# Altium PCB PCB_TINY ORANGE_2022-09-27.pcbdoc
Units mil, origin at the board's own origin, x right, y up, seen from the top; angles counter-clockwise.
Board outline 3081.74 x 4388.89 mil, 2 copper layers (Top Layer, Bottom Layer); 53 components, 93 nets, 349 pads, 9 vias.
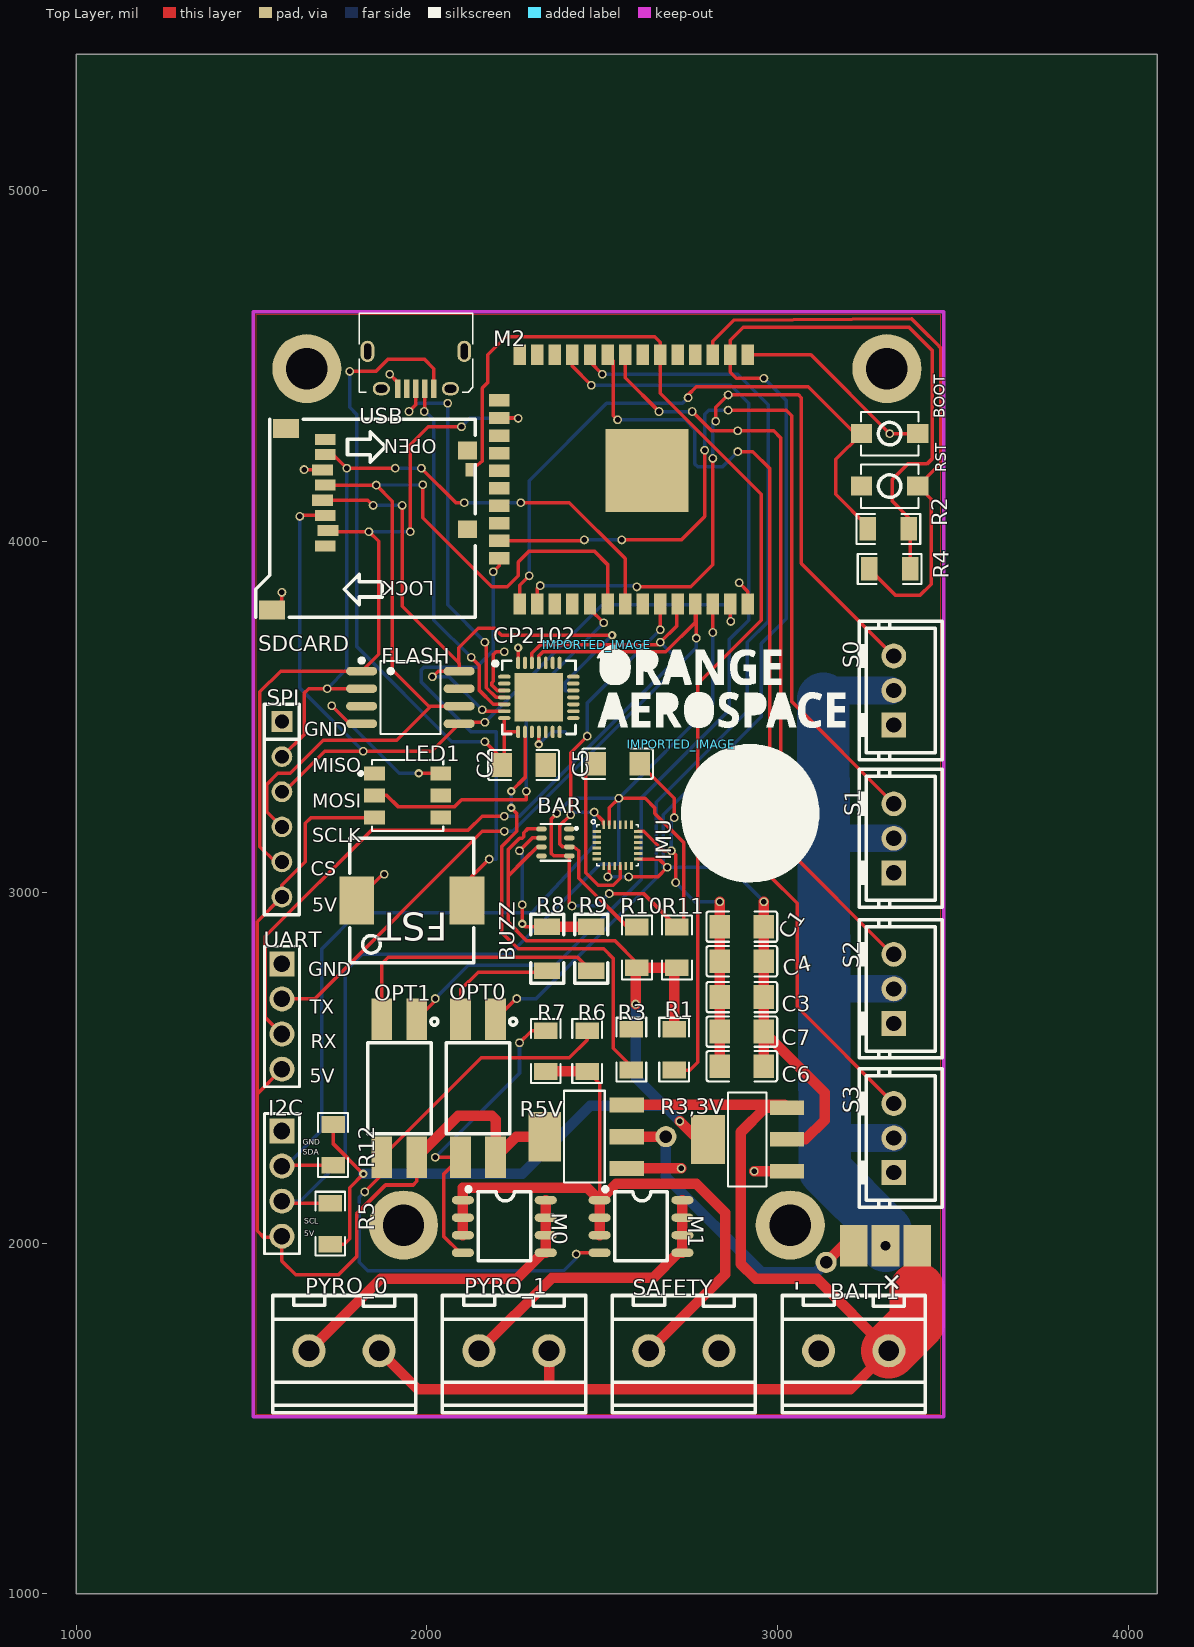
[diagram p0: Top Layer view]
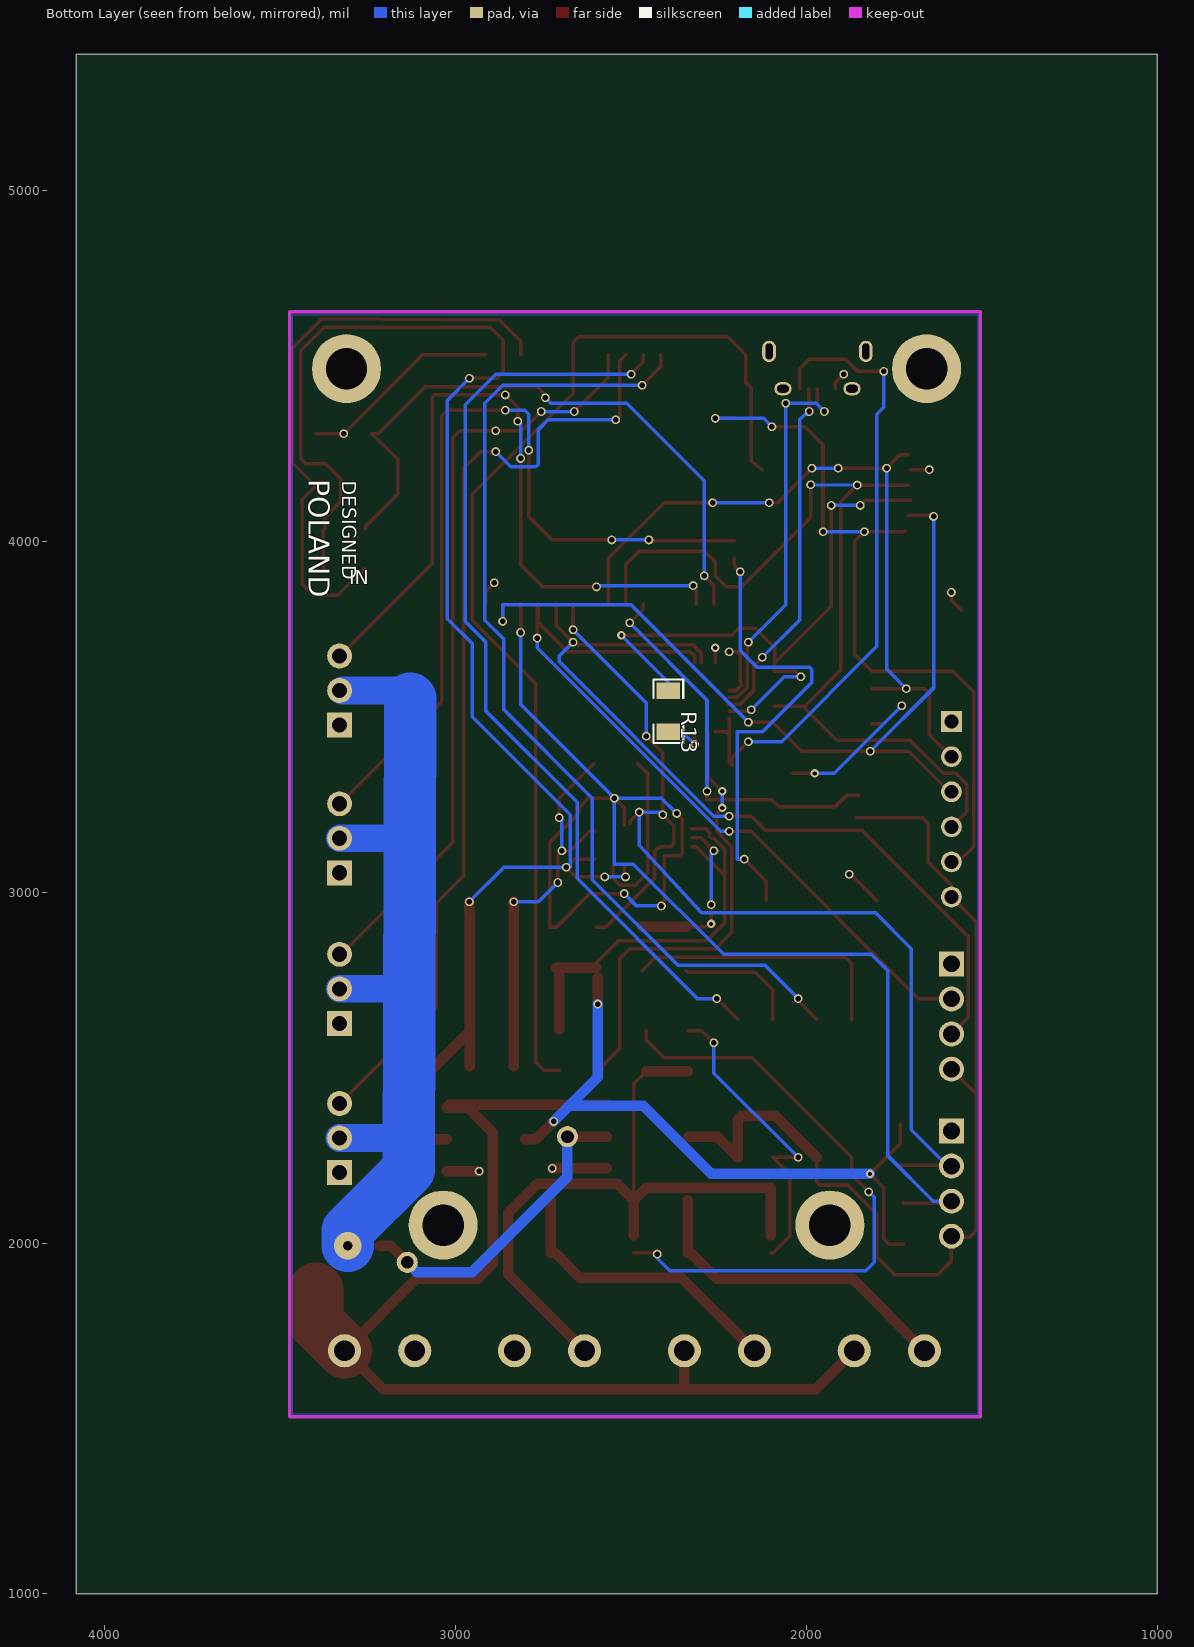
[diagram p1: Bottom Layer view, seen from below]

## Layer stack, top to bottom
Top Layer: signal copper (thickness not stored)
Dielectric: dielectric 12.6, FR-4, Dk 4.8
Bottom Layer: signal copper (thickness not stored)

## Board outline
4081.74,1000 1000,1000 1000,5388.89 4081.74,5388.89

## Components (designator, comment, footprint, x,y, rotation, side; value= is the part's Value field where it differs from the comment)
BAR "BMP280" SENSOR-TH_BMP280-BL 2366.18,3141.85 r180 top
BATT1 "DB127V-5.0-2P-BK-S" CONN-TH_2P-P5.00_DB127V-5.0-2P-BK-S 3216.54,1693.02 r0 top
BOOT "TSA343G00-250J2" SW-SMD_L4.0-W2.9-LS5.0 3318.94,4307.22 r180 top
BUZZ "bzzz" BUZ-SMD_FST-9018 1956.73,2976.49 r180 top
C1 "1uF" C1206 2897.67,2901.69 r0 top
C2 "1uF" C1206 2275.63,3362.32 r180 top
C3 "100nF" C1206 2897.67,2700.9 r0 top
C4 "100nF" C1206 2897.67,2803.26 r0 top
C5 "100nF" C1206 2543.34,3366.26 r180 top
C6 "100nF" C1206 2897.67,2504.05 r0 top
C7 "100nF" C1206 2897.67,2602.48 r0 top
CP2102 "CP2102" QFN-28_L5.0-W5.0-P0.50-BL-EP 2318.9,3555.25 r270 top
FLASH "W25Q128JVSIQ" SOIC-8_L5.3-W5.3-P1.27-LS8.0-BL 1952.79,3555.23 r270 top
I2C "HEADER_PINS_1X4_2.54MM" HEADER_PINS_1X4_2.54MM 1586.65,2169.41 r270 top
IMPORTED_IMAGE "IMPORTED_IMAGE" IMPORTED_IMAGE 2484.29,3704.82 r0 top
IMPORTED_IMAGE "IMPORTED_IMAGE" IMPORTED_IMAGE 2724.45,3421.38 r0 top
IMU "MPU9250" "MPU9250 LAYOUT" 2484.29,3074.92 r0 top
LED1 "WS2812S-W" LED-SMD_6P-L5.0-W5.0-TL 1944.92,3275.7 r0 top
M0 "SM4410PRL" SOP-8_L4.9-W3.9-P1.27-LS6.0-BL 2220.51,2047.36 r270 top
M1 "SM4410PRL" SOP-8_L4.9-W3.9-P1.27-LS6.0-BL 2610.27,2047.36 r270 top
M2 "ESP32S_Module" ESP32S 2204.74,4531.62 r270 top
OPT0 "LTV-816S-TA1-D3-TX" OPTO-SMD-4_L4.6-W6.5-P2.54-LS10.3-BL 2145.71,2441.06 r180 top
OPT1 "LTV-816S-TA1-D3-TX" OPTO-SMD-4_L4.6-W6.5-P2.54-LS10.3-BL 1921.3,2441.06 r180 top
PYRO_0 "DB127V-5.0-2P-BK-S" CONN-TH_2P-P5.00_DB127V-5.0-2P-BK-S 1763.82,1693.03 r0 top
PYRO_1 "DB127V-5.0-2P-BK-S" CONN-TH_2P-P5.00_DB127V-5.0-2P-BK-S 2248.07,1693.03 r0 top
R1 "10K" R1206#1 2704.76,2551.3 r90 top
R2 "10K" R1206#1 3315,4035.55 r0 top
R3 "10K" R1206#1 2582.71,2551.3 r270 top
R3,3V "SC1117-3.3V" SOT-223_L6.5-W3.5-P2.30-LS7.0-BR 2913.42,2295.39 r0 top
R4 "10K" R1206#1 3318.93,3921.37 r0 top
R5 "10K" R1206#1 1724.45,2055.24 r270 top
R5V "CBM1117C-5.0" SOT-223-3_L6.5-W3.4-P2.30-LS7.0-BR 2452.79,2303.27 r0 top
R6 "10K" R1206#1 2456.73,2547.36 r90 top
R7 "10K" R1206#1 2338.62,2547.36 r270 top
R8 "330" R1206#2 2342.56,2838.7 r270 top
R9 "330" R1206#2 2468.54,2838.7 r270 top
R10 "10K" R1206#1 2598.46,2842.64 r90 top
R11 "10K" R1206#1 2712.64,2842.64 r90 top
R12 "10K" R1206#1 1732.32,2279.64 r90 top
R13 "10K" R1206#3 2393.74,3515.86 r90 bottom
RST "TSA343G00-250J2" SW-SMD_L4.0-W2.9-LS5.0 3318.94,4157.62 r0 top
S0 "B3B-XH-A" CONN-TH_3P-P2.50_B3B-XH-A-LF-SN 3330.74,3574.92 r90 top
S1 "B3B-XH-A" CONN-TH_3P-P2.50_B3B-XH-A-LF-SN 3330.74,3153.66 r90 top
S2 "B3B-XH-A" CONN-TH_3P-P2.50_B3B-XH-A-LF-SN 3330.74,2724.53 r90 top
S3 "B3B-XH-A" CONN-TH_3P-P2.50_B3B-XH-A-LF-SN 3330.74,2299.33 r90 top
SAFETY "DB127V-5.0-2P-BK-S" CONN-TH_2P-P5.00_DB127V-5.0-2P-BK-S 2732.32,1693.03 r0 top
SDCARD "XKTF-001B" TF-SMD_XKTF-001B 1842.56,4063.11 r270 top
SPI "1X6 Header (Pin = 2.54)" "1X6 HEADER (PIN = 2.54)" 1586.65,3236.34 r90 top
UART "HEADER_PINS_1X4_2.54MM" HEADER_PINS_1X4_2.54MM 1586.65,2645.78 r270 top
USB "10118194-0001LF" MICRO-USB-SMD_10118194-0001LF 1968.54,4488.3 r180 top
? "" ? 2700.82,4346.57 r0 top
? "" ? 3007.91,4173.34 r0 top
? "" ? 3251.99,2139.08 r0 top

## Footprints (in the part's own frame and the unit in brackets; to place one, negate y for a bottom-side part, rotate by r counter-clockwise, add the part's x,y. Pads: shape width x height; smd on the part's side, far side on the other; paste and mask are expansions set on the pad)
"1X6 HEADER (PIN = 2.54)" [mm]
  rect 1.5x1.5 hole 1: 1(6.35,0)
  round 1.5 hole 1: 2(3.81,0) 3(1.27,0) 4(-1.27,0) 5(-3.81,0) 6(-6.35,0)
  silkscreen extent -7.62,-1.27 7.62,1.27
BUZ-SMD_FST-9018 [mm]
  rect 2.5x3.5 smd: 1(-4,0) 2(4,0)
  silkscreen extent -4.5,-4.5 4.5,4.5
C1206 [mm]
  rect 1.485x1.728 smd: 1(-1.593,0) 2(1.593,0)
  silkscreen extent -2.56,-1.09 2.56,1.09
CONN-TH_2P-P5.00_DB127V-5.0-2P-BK-S [mm]
  round 2.4 hole 1.5: 1(-2.54,0) 2(2.54,0)
  silkscreen extent -5.18,-4.5 5.18,4
CONN-TH_3P-P2.50_B3B-XH-A-LF-SN [mm]
  rect 1.8x1.8 hole 1.1: 1(-2.5,0)
  round 1.8 hole 1.1: 2(0,0) 3(2.5,0)
  silkscreen extent -5,-3.5 5,2.5
ESP32S [mm]
  rect 1.5x0.9 smd: 1(0,18.034) 2(0,16.764) 3(0,15.494) 4(0,14.224) 5(0,12.954) 6(0,11.684) 7(0,10.414) 8(0,9.144) 9(0,7.874) 10(0,6.604) 11(0,5.334) 12(0,4.064) 13(0,2.794) 14(0,1.524) 25(18.034,1.524) 26(18.034,2.794) 27(18.034,4.064) 28(18.034,5.334) 29(18.034,6.604) 30(18.034,7.874) 31(18.034,9.144) 32(18.034,10.414) 33(18.034,11.684) 34(18.034,12.954) 35(18.034,14.224) 36(18.034,15.494) 37(18.034,16.764) 38(18.034,18.034)
  rect 0.9x1.5 smd: 15(3.3,0.034) 16(4.57,0.034) 17(5.84,0.034) 18(7.11,0.034) 19(8.38,0.034) 20(9.65,0.034) 21(10.92,0.034) 22(12.19,0.034) 23(13.46,0.034) 24(14.73,0.034)
  rect 6x6 smd: 101(8.382,10.719)
HEADER_PINS_1X4_2.54MM [mm]
  rect 1.8x1.8 hole 1.2: 1(-3.81,0)
  round 1.8 hole 1.2: 2(-1.27,0) 3(1.27,0) 4(3.81,0)
  silkscreen extent -5.08,-1.27 5.08,1.27
IMPORTED_IMAGE [mil]
  silkscreen extent 0,-236 709,0
LED-SMD_6P-L5.0-W5.0-TL [mm]
  rect 1.5x1 smd: 1(-2.4,1.6) 2(-2.4,0) 3(-2.4,-1.6) 4(2.4,-1.6) 5(2.4,0) 6(2.4,1.6)
  silkscreen extent -3.52,-2.58 2.58,2.58
MICRO-USB-SMD_10118194-0001LF [mm]
  rect 0.4x1.35 smd: 1(-1.301,1.35) 2(-0.65,1.35) 3(0,1.35) 4(0.65,1.35) 5(1.3,1.35)
  oval 1x1.55 hole 0.5 slot 1.15 at 90 deg: 6(-3.5,-1.35) 6(3.5,-1.35)
  oval 1.25x0.95 hole 0.55 slot 0.85 at 0 deg: 6(-2.499,1.35) 6(2.499,1.35)
  silkscreen extent -4.1,-4.1 4.1,1.6
"MPU9250 LAYOUT" [mm]
  rect 0.599x0.2 smd: 1(0,2.5) 2(0,2.1) 3(0,1.701) 4(0,1.299) 5(0,0.9) 6(0,0.499) 13(2.99,0.5) 14(2.99,0.9) 15(2.99,1.3) 16(2.99,1.7) 17(2.99,2.099) 18(2.99,2.501)
  rect 0.2x0.599 smd: 7(0.5,0) 8(0.9,0) 9(1.3,0) 10(1.7,0) 11(2.099,0) 12(2.501,0) 19(2.5,2.99) 20(2.1,2.99) 21(1.701,2.99) 22(1.299,2.99) 23(0.9,2.99) 24(0.499,2.99)
  silkscreen extent -0.4,0 2.99,3.35
OPTO-SMD-4_L4.6-W6.5-P2.54-LS10.3-BL [mm]
  rect 1.5x3 smd: 1(-1.27,-5) 2(1.27,-5) 3(1.27,5) 4(-1.27,5)
  silkscreen extent -2.79,-5.08 2.3,3.3
QFN-28_L5.0-W5.0-P0.50-BL-EP [mm]
  oval 0.28x0.9 smd: 1(-1.501,-2.5) 2(-1.001,-2.5) 3(-0.501,-2.5) 4(0,-2.5) 5(0.5,-2.5) 6(1.001,-2.5) 7(1.501,-2.5) 15(1.501,2.5) 16(1.001,2.5) 17(0.5,2.5) 18(0,2.5) 19(-0.501,2.5) 20(-1.001,2.5) 21(-1.501,2.5)
  oval 0.9x0.28 smd: 8(2.5,-1.501) 9(2.5,-1.001) 10(2.5,-0.5) 11(2.5,0) 12(2.5,0.5) 13(2.5,1.001) 14(2.5,1.501) 22(-2.5,1.501) 23(-2.5,1.001) 24(-2.5,0.5) 25(-2.5,0) 26(-2.5,-0.5) 27(-2.5,-1.001) 28(-2.5,-1.501)
  rect 3.5x3.5 smd: 29(0,0)
  silkscreen extent -2.65,-3.3 2.65,2.65
R1206#1 [mil]
  rect 47.54x66.97 smd: 1(-58.22,0) 2(58.22,0)
  silkscreen extent -91,-42 91,42
R1206#2 [mil]
  rect 47.24x74.8 smd: 1(-63,0) 2(62.99,0)
  silkscreen extent -98,-47 98,47
R1206#3 [mil]
  rect 47.54x66.97 smd: 1(58.22,0) 2(-58.22,0)
  silkscreen extent -91,-42 91,42
SENSOR-TH_BMP280-BL [mm]
  oval 0.767x0.364 smd: 1(-1.008,-0.975) 2(-1.008,-0.325) 3(-1.008,0.325) 4(-1.008,0.975) 5(1.009,0.975) 6(1.009,0.325) 7(1.009,-0.325) 8(1.009,-0.975)
  silkscreen extent -1.61,-1.33 1.08,1.33
SOIC-8_L5.3-W5.3-P1.27-LS8.0-BL [mm]
  oval 0.63x2.25 smd: 1(-1.905,-3.53) 2(-0.635,-3.53) 3(0.635,-3.53) 4(1.905,-3.53) 5(1.905,3.53) 6(0.635,3.53) 7(-0.635,3.53) 8(-1.905,3.53)
  silkscreen extent -2.82,-3.68 2.64,2.18
SOP-8_L4.9-W3.9-P1.27-LS6.0-BL [mm]
  oval 0.6x1.6 smd: 1(-1.905,-3) 2(-0.635,-3) 3(0.635,-3) 4(1.905,-3) 5(1.905,3) 6(0.635,3) 7(-0.635,3) 8(-1.905,3)
  silkscreen extent -2.84,-2.74 2.5,1.9
SOT-223-3_L6.5-W3.4-P2.30-LS7.0-BR [mm]
  rect 2.5x1.1 smd: 1(2.97,-2.3) 2(2.97,0) 3(2.97,2.3)
  rect 2.34x3.6 smd: 4(-2.97,0)
  silkscreen extent -1.57,-3.33 1.37,3.33
SOT-223_L6.5-W3.5-P2.30-LS7.0-BR [mm]
  rect 2.465x1.05 smd: 1(2.857,-2.3) 2(2.857,0) 3(2.857,2.3)
  rect 2.465x3.54 smd: 4(-2.857,0)
  silkscreen extent -1.4,-3.4 1.4,3.4
SW-SMD_L4.0-W2.9-LS5.0 [mm]
  rect 1.53x1.36 smd: 1(-2.035,0) 2(2.035,0)
  silkscreen extent -2.08,-1.58 2.08,1.58
TF-SMD_XKTF-001B [mm]
  rect 0.8x1.5 smd: 1(1.925,-3.363) 2(0.825,-3.163) 3(-0.275,-3.363) 4(-1.375,-3.563) 5(-2.475,-3.363) 6(-3.575,-3.563) 7(-4.675,-3.363) 8(-5.775,-3.363)
  rect 1x0.85 smd: 9(-3.585,7.212)
  rect 1.3x1.4 smd: 10(-4.975,6.937) 10(0.725,6.937)
  rect 1.4x1.9 smd: 11(-6.575,-6.213) 12(6.575,-7.213)
  silkscreen extent -7.24,-8.39 7.11,7.48
? [mil]

## Free pads (board coordinates)
  rect 78.74x118.11 smd: 4(3397.67,1992.25) 5(3307.12,1992.25) 6(3216.57,1992.25) 9(3307.12,1992.24)
  round 196.85 hole 118.11: 10(1657.52,4492.24) 10(1933.11,2051.3) 10(3035.47,2051.3) 10(3311.06,4492.24)
  round 25 hole 15.75: 11(2547.28,3267.83) 12(2814.99,3740.28) 13(1822.87,2145.79) 14(2425.23,1968.62) 15(2370.12,3224.52) 17(2456.73,3445) 18(2665.39,3748.14) 19(2476.42,3228.46) 20(2409.49,3220.59) 21(1846.5,4102.47) 21(1929.17,4102.47) 21(2165.39,3484.37) 22(2866.18,3771.77) 23(2165.39,3429.25) 24(1779.56,4484.37) 25(2126.02,3669.41) 26(1992.16,4370.19) 27(2165.39,3712.71) 28(1948.86,4370.19) 28(2059.09,4393.81) 29(2023.66,2244.21) 30(2263.82,2570.98) 31(1715.41,3580.23) 32(1771.69,4208.77) 33(2177.21,3094.61) 34(2189.01,3913.5) 35(2023.66,2696.96) 36(2255.94,2696.97) 36(2685.08,3070.98) 36(2708.7,3027.68) 36(2960.67,2972.55) 37(2468.54,4444.99) 38(2500.04,4476.52) 43(2960.64,4464.72) 44(2220.51,3173.34) 45(2767.76,3724.52) 46(2220.51,3216.65) 47(2665.39,3712.71) 48(2413.43,2960.74) 49(2519.73,2996.18) 50(1586.66,3854.44) 52(1893.74,4476.49) 53(2834.69,2972.55) 54(2724.44,2212.72) 56(2933.11,2204.84) 57(2720.51,2346.57) 58(2594.53,2681.22) 59(3318.94,4307.2) 60(1728.39,3531.61) 61(2220.51,3685.15) 62(2157.52,3519.8) 64(2015.79,3614.28) 65(1877.99,3051.29) 66(1649.65,4204.84) 67(1818.19,3401.69) 68(1637.84,4070.98) 69(2885.84,4256.02) 70(2885.87,4315.07) 71(2858.31,4374.13) 72(2858.31,4417.43) 74(1834.69,4027.67) 75(1952.8,4027.67) 76(2098.47,4326.88) 77(2259.88,4350.5) 78(1855.36,4160.54) 79(1988.23,4161.53) 80(2744.14,4409.56) 81(2291.38,3901.69) 82(2283.51,3287.51) 83(2503.97,3767.82) 84(1909.44,4208.82) 85(1984.29,4208.77) 86(2106.34,4110.35) 87(2267.76,4110.35) 88(2889.8,3882) 89(2543.35,4346.57) 90(2661.46,4370.19) 90(2755.95,4370.19) 91(2791.38,4259.95) 93(2448.86,4004.05) 93(2555.16,4004.05) 94(2815,4236.33) 94(2822.88,4342.63) 95(2322.88,3874.13) 95(2598.44,3870.22) 96(2263.82,3118.22) 97(2515.79,3043.42) 97(2574.84,3043.42) 98(2271.7,2964.68) 100(2696.89,3118.22) 100(2704.76,3212.71)
  round 60 hole 36: 41(3137.83,1944.99) 42(2681.14,2303.27)

## Via types
v1: diameter 24, hole 12, Top Layer to Bottom Layer, tented both sides, 8 vias
v2: diameter 78.74, hole 27.56, Top Layer to Bottom Layer, tented both sides, 1 vias

## Nets (pads, with @x,y where several pads share a name; then routed paths per layer and width w, separated by ;. In a path a pad name is that pad's centre, name@x,y a point inside that pad or via, vN(x,y) a via of type N, cw(c..) or ccw(c..) an arc to the next point about the centre after c; other vN are vias at no path point)
+3.3V: BAR.6 BAR.8 C1.2 C3.2 C4.2 C6.2 C7.2 CP2102.6 FLASH.8 IMU.8 IMU.13 M2.2 pad.21@1846.5,4102.47 pad.21@1929.17,4102.47 pad.36@2685.08,3070.98 pad.36@2960.67,2972.55 pad.43 pad.57 pad.58 pad.62 pad.64 pad.97 R1.2 R2.2 R3,3V.2 R3,3V.4 R3.1 R4.2 R5.2 R10.1 R11.1 R12.2 R13.1 SDCARD.4 | length 9615.6
  Top Layer w10: SDCARD.4 1831.73,4117.24 pad.21@1846.49,4102.48 ; R5.2 1764.66,1997.02 1779.57,2011.93 1779.57,2157.6 v1(1818.94,2196.97) 1732.32,2283.58 R12.2 ; pad.21@1929.17,4102.48 1929.17,3815.08 2091.77,3652.48 FLASH.8 2031.73,3630.23 pad.64 ; 2090.59,3652.48 2090.59,3696.96 2145.71,3752.08 2192.95,3752.08 2212.63,3732.4 v1(2527.6,3732.4) ; pad.62 2161.46,3515.86 CP2102.6 ; BAR.6@2326.47,3129.05 2314.01,3129.05 2279.57,3094.6 2232.34,3047.42 ; BAR.8@2326.44,3180.22 2286.44,3180.22 2275.64,3169.42 2275.64,3157.62 2271.74,3153.62 2263.84,3153.62 2232.34,3122.12 2232.34,3063.12 2232.34,3047.42 ; pad.97@2515.78,3043.42 2519.74,3047.38 IMU.8 ; pad.97@2574.84,3043.42 2657.52,3043.42 2685.08,3070.98 2661.46,3094.6 IMU.13 ; R10.1@2598.44,2784.42 2598.44,2799.32 2535.44,2862.32 2283.54,2862.32 2232.34,2913.52 2232.34,3047.42 ; pad.43 2881.89,4464.72 2864.74,4481.87 M2.2 2864.74,4573.52 2901.64,4610.32 3374.04,4610.32 3440.94,4543.42 3440.94,4236.32 3425.24,4220.62 3370.15,4220.62 3326.81,4177.28 3326.81,4114.29 3373.22,4067.87 R2.2 3377.15,4031.62 R4.2@3377.15,3921.37
  Top Layer w29.92: pad.58 2594.54,2756.02 ; R10.1 R11.1 2704.76,2776.54 R1.2 ; pad.57 2771.69,2295.39 2800.92,2295.39 ; C6.2@2960.37,2504.05 C7.2 ; pad.36@2960.64,2972.52 2960.34,2901.72 C4.2 C3.2 C7.2 ; 3025.92,2295.39 3078.77,2295.39 3133.89,2350.51 3133.89,2428.95 C7.2
  Bottom Layer w10: pad.21@1846.5,4102.48 pad.21@1929.17,4102.48 ; pad.64 2063.03,3614.29 pad.62 ; R13.1@2400.78,3574.08 R13.1 2393.74,3598.54 v1(2527.6,3732.4) ; pad.97@2515.78,3043.42 pad.97@2574.84,3043.42 ; pad.36@2685.04,3071.02 2673.24,3071.02 2673.24,3220.62 2952.84,3500.12 2952.84,3708.82 3023.64,3779.62 3023.64,4401.72 pad.43 ; pad.36@2685.08,3070.98 2862.24,3070.98 pad.36@2960.67,2972.56
  Bottom Layer w29.92: v1(1818.94,2196.97) 2271.69,2196.97 2465.65,2390.93 2676.15,2390.93 ; pad.58 2594.53,2472.56 pad.57
+5V: I2C.4 LED1.3 OPT0.4 OPT1.4 pad.6 pad.41 pad.42 R5V.2 R5V.4 SPI.6 UART.4 | length 3786.3
  Top Layer w10: UART.4@1586.65,2495.78 1515.79,2424.92 ; SPI.6@1586.64,2986.32 1586.64,3019.82 1653.54,3086.72 1653.54,3196.92 1669.34,3212.72 LED1.3@1858.34,3212.72 ; SPI.6@1586.65,2986.33 1515.79,2915.47 1515.79,2424.92 ; OPT1.4 1971.29,2176.1 1960.67,2165.47 1881.93,2165.47 1799.25,2082.79 1799.25,1960.75 1748.07,1909.57 1626.02,1909.57 1586.65,1948.94 1586.65,2019.41 1583.11,2015.87 1535.47,2015.87 1515.79,2035.55 1515.79,2424.92
  Top Layer w29.92: OPT1.4 2089.41,2362.32 2185.08,2362.32 2195.71,2351.69 OPT0.4 2254.77,2303.27 R5V.4 ; R5V.2 pad.42 ; pad.41 3185.08,1992.25 pad.6
  Bottom Layer w29.92: pad.42 2681.14,2189.09 2952.79,1917.44 3110.27,1917.44 pad.41
BAR_2: BAR.2
BAR_5: BAR.5
BATT: BATT1.2 pad.4 PYRO_0.2 PYRO_1.2 R3,3V.3 R5V.3 | length 3435.2
  Top Layer w29.92: PYRO_0.2 1974.05,1582.8 2346.49,1582.8 ; PYRO_1.2 2348.07,1584.37 2346.49,1582.8 ; R5V.3 3018.04,2393.82 3025.92,2385.94 ; 2972.44,2385.92 3025.94,2385.92 2964.64,2385.92 2893.74,2315.12 2893.74,1941.02 2937.04,1897.72 3111.84,1897.72 BATT1.2 3206.32,1582.8 2346.49,1582.8
  Top Layer w157.48: BATT1.2 3397.67,1774.15 3397.67,1865.56
BUZZER: BUZZ.1 M2.24 pad.33 pad.34 | length 1329.9
  Top Layer w10: BUZZ.1 2114.21,3031.61 pad.33 ; pad.34 2206.08,3930.56 M2.24
  Bottom Layer w10: pad.33 2196.84,3094.62 2196.84,3456.82 2126.04,3456.82 1984.34,3598.52 1984.34,3634.02 1992.14,3641.82 2141.74,3641.82 2189.04,3689.12 pad.34
CP2102_1: CP2102.1
CP2102_2: CP2102.2
CP2102_9: CP2102.9 R3.2 | length 1300.8
  Top Layer w10: v1(2240.2,3240.27) 2255.94,3224.53 2255.94,3173.32 2212.64,3130.02 2212.64,2885.92 2259.86,2838.7 2503.97,2838.7 2531.53,2811.14 2531.53,2555.24 2582.72,2504.05 R3.2 ; v1(2240.24,3287.52) 2279.54,3326.82 CP2102.9
  Bottom Layer w10: v1(2240.2,3240.27) v1(2240.24,3287.52) v1(2240.24,3287.52)
CP2102_10: CP2102.10
CP2102_11: CP2102.11 R13.2 | length 125.3
  Top Layer w10: CP2102.11 CP2102.11 v1(2318.94,3421.38)
  Bottom Layer w10: v1(2318.94,3421.38) 2355.2,3457.64 R13.2
CP2102_12: CP2102.12
CP2102_13: CP2102.13
CP2102_14: CP2102.14
CP2102_15: CP2102.15
CP2102_16: CP2102.16
CP2102_17: CP2102.17
CP2102_18: CP2102.18
CP2102_19: CP2102.19
CP2102_20: CP2102.20
CP2102_21: CP2102.21
CP2102_22: CP2102.22
CP2102_23: CP2102.23
CP2102_27: CP2102.27
CP2102_29: CP2102.29
CS: FLASH.1 M2.16 pad.74 pad.75 pad.76 pad.77 SDCARD.2 SPI.5 | length 2142.1
  Top Layer w10: SPI.5@1586.64,3086.32 1567.34,3086.32 1523.64,3130.02 1523.66,3570.98 1582.91,3630.23 FLASH.1 1862.24,3678.66 1862.24,4000.11 pad.74 1721,4027.67 SDCARD.2 ; pad.75@1952.84,4027.62 1952.84,4275.72 2003.94,4326.92 pad.76@2098.44,4326.92 ; M2.16 2258.69,4351.7 pad.77
  Bottom Layer w10: pad.74 pad.75 ; pad.76 2122.09,4350.51 pad.77
DTR: CP2102.28 | length 43.3
  Top Layer w10: CP2102.28 v1(2259.8,3696.97)
EN: M2.3 R4.1 RST.2 | length 1684.3
  Top Layer w10: M2.3 2814.74,4570.72 2874.04,4630.02 3381.93,4633.97 3413.44,4602.52 3452.84,4563.12 3464.64,4551.32 3464.64,4223.2 RST.2 3437.04,4119.63 3437.04,3878.07 3405.55,3846.57 3335.51,3846.57 R4.1
FLASH_3: FLASH.3
FLASH_7: FLASH.7
GND: BAR.1 BAR.7 BATT1.1 BOOT.1 BUZZ.2 C1.1 C2.1 C3.1 C4.1 C5.1 C6.1 C7.1 CP2102.3 FLASH.4 I2C.1 IMU.18 LED1.6 M2.1 M2.15 M2.38 M2.101 pad.36@2708.7,3027.68 pad.50 pad.52 pad.53 pad.54 pad.56 pad.59 pad.60 pad.61 pad.65 pad.66 pad.88 pad.96 pad.98 pad.100 R3,3V.1 R5V.1 R8.1 R9.1 RST.1 S0.1 S1.1 S2.1 S3.1 SAFETY.2 SDCARD.6 SDCARD.11 SDCARD.12 SPI.1 UART.1 USB.5 | length 3445.5
  Top Layer w10: SDCARD.12 1586.65,3832.3 pad.50 ; pad.66 SDCARD.6 ; BUZZ.2@1799.25,2976.49 1874.06,3051.3 pad.65 ; pad.52 1917.35,4452.88 USB.5@1917.35,4435.15 ; v1(1976.42,3338.7) LED1.6 ; 2189.01,3602.48 2189.01,3678.58 ; 2189.04,3601.22 2185.41,3597.59 2185.41,3590.33 2200.79,3574.96 CP2102.3 ; 2189.04,3677.32 2196.87,3685.15 pad.61@2220.51,3685.15 ; pad.96 2300.23,3154.64 BAR.7 ; pad.98 v1(2271.69,2909.57) 2279.56,2901.7 R8.1 ; IMU.18@2601.94,3173.32 2618.14,3173.32 2673.24,3118.22 pad.100@2696.84,3118.22 ; C5.1 2704.76,3267.54 pad.100@2704.76,3212.71 ; pad.100@2696.89,3118.22 2708.7,3106.41 pad.36@2708.7,3027.68 ; pad.88 2914.74,3857.06 M2.38 ; M2.1 3094.51,4531.62 pad.59
  Top Layer w10.39: pad.60 1779.77,3480.23 FLASH.4 ; pad.59 BOOT.1@3399.05,4307.2
  Top Layer w29.92: R8.1 R9.1 ; R5V.1 pad.54 ; pad.53@2834.64,2972.52 C1.1@2834.94,2901.72 ; C6.1@2834.98,2504.05 C7.1 C3.1 C4.1 C1.1 ; pad.56 3025.92,2204.84
  Bottom Layer w10: pad.60 1921.3,3338.7 v1(1976.42,3338.7) ; pad.96 2271.69,3110.36 pad.98 ; pad.100@2696.89,3118.22 2696.89,3204.84 pad.100@2704.76,3212.71 ; pad.36@2708.7,3027.68 2763.82,2972.56 pad.53
IMU_1: IMU.1
IMU_7: IMU.7
IMU_9: IMU.9
IMU_10: C5.2 IMU.10 | length 479.2
  Top Layer w10: C5.2 2452.84,3338.45 2452.84,3055.22 2488.24,3019.82 2531.55,3019.82 2551.22,3039.49 IMU.10
IMU_11: IMU.11
IMU_12: IMU.12
IMU_19: IMU.19
IMU_20: IMU.20
IMU_21: IMU.21
IMU_22: IMU.22
IO0: BOOT.2 M2.25 pad.80 pad.81 R2.1 | length 1821
  Top Layer w10: M2.25 2264.74,3875.05 pad.81 ; pad.80@2744.14,4409.52 2744.14,4417.42 2767.74,4441.02 3086.64,4441.02 3220.54,4307.22 BOOT.2 ; BOOT.2 3165.39,4233.79 3165.39,4133.97 3256.78,4042.58 R2.1
  Bottom Layer w10: pad.81@2291.34,3901.72 2291.34,4173.32 2511.84,4393.82 2728.34,4393.82 pad.80@2744.14,4409.52
IO12: M2.14
IO14: M2.13
LED: LED1.2 M2.29 pad.82 pad.83 | length 1119.6
  Top Layer w10: LED1.2 1885.84,3275.72 1917.34,3244.22 2078.74,3244.22 2098.54,3263.92 2283.54,3263.92 pad.82 ; M2.29 2464.74,3807.07 pad.83
  Bottom Layer w10: pad.82 2283.5,3547.35 pad.83
LED1_1: LED1.1
LED1_4: LED1.4
LED1_5: LED1.5
M0_4: M0.4 OPT0.3 pad.29 pad.30 R7.1 | length 906.7
  Top Layer w10: pad.29 OPT0.3 2047.28,2195.78 2047.28,2019.8 2094.72,1972.36 M0.4 ; pad.30 2298.42,2605.58 R7.1
  Bottom Layer w10: pad.29 2263.82,2484.37 pad.30
M1_4: M1.4 OPT1.3 pad.13 pad.14 R6.2 | length 1799.4
  Top Layer w10: pad.13 1871.3,2194.21 OPT1.3 2154.81,2527.72 2405.54,2527.72 2456.73,2578.91 R6.2 ; pad.14 2428.97,1972.36 M1.4
  Bottom Layer w10: pad.13 1807.12,2130.04 1807.12,1945 1830.75,1921.38 2389.8,1921.38 2425.24,1956.82 pad.14
M2_4: M2.4
M2_5: M2.5
M2_7: M2.7
M2_12: M2.12
M2_17: M2.17
M2_18: M2.18
M2_19: M2.19
M2_20: M2.20
M2_21: M2.21
M2_22: M2.22
M2_27: M2.27
M2_28: M2.28
M2_32: M2.32
MISO: FLASH.2 M2.31 pad.31 pad.32 pad.84 pad.85 pad.86 pad.87 SDCARD.7 SPI.2 | length 2135
  Top Layer w10: SPI.2@1586.65,3386.33 1649.65,3449.32 1649.65,3567.04 1662.83,3580.23 pad.31 FLASH.2 ; SDCARD.7 1733.31,4247.16 pad.32 ; pad.32 pad.84 ; pad.85 2082.72,4110.35 pad.86 ; pad.87 2405.55,4110.35 2564.74,3951.16 M2.31
  Bottom Layer w10: pad.31 1771.69,3636.51 pad.32 ; pad.84 pad.85 ; pad.86 pad.87
MOSI: FLASH.5 M2.37 pad.21@2165.39,3484.37 pad.22 pad.67 pad.68 SDCARD.3 SPI.3 | length 2415.3
  Top Layer w10: SPI.3@1586.65,3286.33 1593.34,3286.33 1708.7,3401.69 pad.67 2013.23,3401.69 FLASH.5 2095.91,3484.37 pad.21@2165.39,3484.37 ; pad.68 1640.78,4073.93 SDCARD.3 ; M2.37 2864.74,3773.21 pad.22
  Bottom Layer w10: pad.68 1637.83,3582.04 pad.67 ; pad.21@2165.34,3484.42 2500.04,3819.02 2866.14,3819.02 pad.22@2866.14,3771.82
N$7538: 
PYRO0: M2.11 OPT1.1 pad.35 pad.37 | length 2872
  Top Layer w10: OPT1.1 2023.66,2690.27 pad.35 ; M2.11 2414.74,4498.8 pad.37
  Bottom Layer w10: pad.35 2118.11,2791.42 2366.14,2791.42 2610.24,3035.52 2610.24,3267.82 2862.24,3519.82 2862.24,3720.62 2917.34,3775.72 2917.34,4393.82 2866.14,4445.02 pad.37
PYRO1: M2.10 OPT0.1 pad.36@2255.94,2696.97 pad.38 | length 2684.8
  Top Layer w10: OPT0.1 2254.77,2696.97 pad.36@2255.94,2696.97 ; M2.10 2464.74,4511.82 pad.38
  Bottom Layer w10: pad.36@2255.94,2696.92 2311.04,2696.92 2653.54,3039.52 2653.54,3256.02 2913.44,3515.82 2913.44,3586.72 2913.44,3712.72 2972.44,3771.72 2972.44,4389.92 2885.84,4476.52 pad.38
PYRO_OUT0: M0.5 M0.6 M0.7 M0.8 PYRO_0.1 | length 939.7
  Top Layer w29.92: PYRO_0.1 1868.55,1897.76 2255.94,1897.76 2330.55,1972.36 M0.5 M0.8@2338.61,2121.58
PYRO_OUT1: M1.5 M1.6 M1.7 M1.8 PYRO_1.1 | length 846
  Top Layer w29.92: PYRO_1.1 2356.73,1901.69 2645.71,1901.69 2716.38,1972.36 M1.5 M1.8
R8_2: OPT0.2 R8.2 | length 353
  Top Layer w10: OPT0.2 2095.71,2721.77 2145.71,2771.77 2338.63,2771.77 R8.2
R9_2: OPT1.2 R9.2 | length 779.9
  Top Layer w10: OPT1.2 1871.34,2796.62 1889.84,2815.12 2429.14,2815.12 R9.2
RTS: CP2102.24
RX: CP2102.26 M2.34 pad.46 pad.47 UART.3 | length 2396.5
  Top Layer w10: UART.3@1586.64,2595.82 1539.44,2643.02 1539.44,2874.12 1842.64,3177.32 2118.15,3177.28 2157.51,3216.65 pad.46 ; CP2102.26 2299.2,3681.16 2322.87,3704.84 2657.52,3704.84 pad.47 ; pad.47 2712.64,3759.92 2712.64,3821.62 M2.34
  Bottom Layer w10: pad.46 2263.84,3216.62 2704.74,3657.62 2704.74,3669.42 2704.74,3673.36 pad.47
SAFEIN: M0.1 M0.2 M0.3 M1.1 M1.2 M1.3 R6.1 R7.2 SAFETY.1 | length 2035.2
  Top Layer w10: R6.1 2492.16,2453.7 M1.1
  Top Layer w29.92: M0.3 M0.1 2102.4,2157.6 2456.93,2157.6 M1.1 ; R7.2 R6.1 ; M1.3 M1.1 ; SAFETY.1 2850.43,1911.14 2850.43,2086.73 2767.75,2169.41 2539.21,2169.41 M1.1
SCL: BAR.4 I2C.3 IMU.23 M2.36 pad.11 pad.12 pad.15 pad.48 pad.49 R5.1 R11.2 | length 4123.6
  Top Layer w10: I2C.3@1586.65,2119.41 1592.6,2113.46 R5.1 ; pad.15 2354.37,3208.78 2354.37,3181.22 2354.37,3110.35 2361.26,3103.46 BAR.4 2405.88,2968.29 pad.48 ; pad.49 2617.32,2996.18 R11.2 ; IMU.23 2519.73,3240.28 pad.11 ; pad.11@2547.24,3267.82 2622.04,3267.82 2649.64,3240.22 2649.64,3224.52 2732.34,3141.82 2732.34,2900.82 R11.2@2712.64,2900.82 ; M2.36 2815,3821.36 pad.12
  Bottom Layer w10: I2C.3@1586.64,2119.42 1639.04,2119.42 1767.74,2248.12 1767.74,2775.72 1815.04,2822.92 2236.24,2822.92 2493.34,3080.02 2547.24,3080.02 ; pad.15 2413.42,3267.83 pad.11 ; pad.48 2484.29,2960.74 pad.49 ; 2547.28,3080.03 pad.11 ; pad.12 2815,3535.55 pad.11
SCLK: FLASH.6 M2.30 pad.78 pad.79 SDCARD.5 SPI.4 | length 2733
  Top Layer w10: SPI.4@1586.64,3186.32 1543.34,3229.62 1543.35,3307.2 1574.86,3338.72 1610.24,3338.72 1704.74,3433.22 1913.44,3433.22 2010.45,3530.23 FLASH.6 2005.36,3530.23 1901.61,3633.97 1901.61,4114.28 pad.78 SDCARD.5 ; pad.79 1988.23,4067.04 2185.08,3870.19 2228.38,3870.19 2259.88,3901.69 2259.88,3941.06 2291.38,3972.55 2476.41,3972.55 2514.74,3934.23 M2.30
  Bottom Layer w10: pad.78@1855.34,4160.52 pad.79
SD_SWITCH: M2.6 R1.1 SDCARD.9 | length 3190.5
  Top Layer w10: SDCARD.9 2157.52,4228.46 2157.54,4278.42 2157.54,4437.12 2173.24,4452.82 2173.24,4531.62 2224.44,4582.82 2649.64,4582.82 2664.74,4567.72 M2.6 2664.74,4422.02 2952.79,4133.97 2952.79,3775.7 2771.69,3594.6 2771.69,2515.86 2748.9,2493.08 R1.1
SDA: BAR.3 I2C.2 IMU.24 M2.33 pad.17 pad.18 pad.19 pad.20 R10.2 R12.1 | length 3111.3
  Top Layer w10: I2C.2@1586.65,2219.41 1588.67,2221.43 R12.1 ; BAR.3@2405.84,3129.02 2418.34,3129.02 2433.14,3118.22 2433.14,3039.42 2571.74,2900.82 R10.2@2598.44,2900.82 ; BAR.3 2386.85,3129.05 2377.99,3137.91 2377.99,3189.09 pad.20 2409.49,3397.76 pad.17 ; pad.19 2501.97,3202.91 IMU.24@2501.97,3194.79 ; M2.33 pad.18
  Bottom Layer w10: I2C.2@1586.64,2228.42 1586.64,2219.42 1597.24,2219.42 1700.84,2322.92 1700.84,2838.72 1803.14,2941.02 2299.14,2941.02 2476.41,3133.97 ; pad.20 2409.49,3228.46 pad.19 2476.42,3133.98 ; pad.17 2456.73,3539.48 pad.18
SDCARD_1: SDCARD.1
SDCARD_8: SDCARD.8
SDCARD_10: SDCARD.10
SERVO0: M2.26 pad.5 pad.9 S0.3 | length 2399
  Bottom Layer w78.74: 3129.97,3574.92 3206.17,3574.92 3322.87,3574.92 ; 3133.89,2724.53 3330.74,2724.53 ; 3133.89,3153.66 3330.74,3153.66 ; 3149.39,2299.33 3330.99,2299.33
  Bottom Layer w149.61: 3129.96,3551.3 3133.89,2208.78 3307.12,2035.55 v2(3307.12,1992.24)
SERVO1: M2.23 S1.3
SERVO2: M2.8 S2.3
SERVO3: M2.9 S3.3
SV_SWITCH: pad.69 pad.70 pad.71 pad.72 pad.89 pad.90 pad.91 pad.93 pad.94 pad.95 S0.2 S1.2 S2.2 S3.2 | length 9454.6
  Top Layer w10: 2206.08,4001.7 2446.5,4001.7 pad.93@2448.86,4004.05 ; 2314.74,3821.62 2314.74,3866 pad.95@2322.87,3874.13 ; 2514.74,4531.62 2531.53,4514.82 2531.53,4358.38 pad.89 ; pad.93@2555.16,4004.05 2724.45,4004.05 2791.38,4070.98 pad.91 ; 2564.74,4531.62 2564.74,4466.91 pad.90@2661.45,4370.19 ; pad.95@2598.44,3870.22 2752.04,3870.22 2815.04,3933.22 pad.94@2815.04,4236.32 ; pad.90@2755.94,4370.19 2811.06,4315.07 pad.70 2988.22,4315.07 3007.91,4295.39 ; pad.94@2822.87,4342.63 2822.87,4382 pad.72 3059.02,4417.44 3066.94,4409.52 3066.94,3937.12 3330.74,3673.32 ; pad.71 3023.73,4374.13 3039.44,4358.42 3039.44,3543.52 3330.74,3252.02 ; pad.69 2929.14,4256.02 2976.44,4208.82 2976.44,3047.32 3055.14,2968.62 3055.14,2673.32 3330.74,2397.72 ; 3007.94,4295.42 3007.94,3141.82 3330.74,2819.02
  Bottom Layer w10: pad.95@2322.87,3874.13 2594.53,3874.13 pad.95@2598.44,3870.22 ; pad.93@2448.86,4004.05 pad.93@2555.16,4004.05 ; pad.89 2736.24,4346.62 2763.84,4319.02 2763.84,4220.62 2771.74,4212.72 2842.54,4212.72 pad.69 ; pad.90@2661.45,4370.19 pad.90@2755.94,4370.19 ; pad.91@2791.34,4259.92 2791.34,4362.32 2803.14,4374.12 pad.71 ; pad.94@2815,4236.33 2815,4334.76 pad.94@2822.87,4342.63
TX: CP2102.25 M2.35 pad.44 pad.45 UART.2 | length 2279.5
  Top Layer w10: UART.2@1586.65,2695.78 1679.95,2695.78 2157.51,3173.34 pad.44 ; CP2102.25 2318.94,3673.32 2330.74,3685.12 2350.44,3685.12 2358.3,3685.15 2362.24,3685.12 2681.14,3685.12 2764.74,3768.72 M2.35 2767.75,3818.61 pad.45@2767.75,3724.52
  Bottom Layer w10: pad.44 2244.14,3173.32 2767.74,3696.92 pad.45@2767.74,3724.52
USB_4: USB.4
USB_6: USB.6
USBD+: CP2102.4 pad.27 pad.28 USB.3 | length 1112.4
  Top Layer w10: pad.28@1948.86,4370.19 1968.55,4389.88 USB.3@1968.55,4435.15 ; pad.27 2169.33,3708.77 2169.33,3582.79 2196.86,3555.26 CP2102.4
  Bottom Layer w10: pad.28@1948.86,4370.19 1972.48,4393.81 2059.09,4393.81 2059.09,3819.02 pad.27
USBD-: CP2102.5 pad.25 pad.26 USB.2 | length 1005.3
  Top Layer w10: pad.26 1994.15,4372.18 USB.2@1994.15,4435.15 ; pad.25@2133.94,3661.52 2149.64,3645.82 2149.64,3574.92 2189.04,3535.52 CP2102.5@2224.44,3535.52
  Bottom Layer w10: pad.26@1992.14,4362.32 2003.94,4362.32 2019.74,4346.62 2019.74,3775.72 pad.25
VBUS: C2.2 CP2102.7 CP2102.8 pad.23 pad.24 USB.1 | length 1860.3
  Top Layer w10: pad.24 1854.37,4484.36 1889.8,4519.8 1992.16,4519.8 2019.75,4492.21 USB.1@2019.75,4435.15 ; pad.23 2212.93,3381.71 C2.2 2220.48,3369.86 CP2102.7 ; 2220.48,3447.99 2229.32,3456.83 CP2102.8
  Bottom Layer w10: pad.24 1779.57,4381.99 1799.24,4362.32 1799.24,3700.92 2070.94,3429.22 pad.23
pads on no net: IMU.2 IMU.3 IMU.4 IMU.5 IMU.6 IMU.14 IMU.15 IMU.16 IMU.17

## Polygon pours and split planes (outlines as drawn)
GND on Bottom Layer (solid): 1511.85,4645.78 1511.85,1511.93 3464.6,1511.93 3464.6,4645.78
GND on Top Layer (solid): 1511.85,4645.78 1511.85,1511.93 3464.6,1511.93 3464.6,4645.78

## Silkscreen, mask and mechanical layers (free items; w line width, h text height)
Top Overlay:
  text "GND" at 1649.65,3444.99 h39.37
  text "MISO" at 1673.27,3342.63 h39.37
  text "MOSI" at 1673.27,3240.26 h39.37
  text "SCLK" at 1673.27,3141.84 h39.37
  text "CS" at 1669.33,3047.35 h39.37
  text "5V" at 1673.27,2944.99 h39.37
  text "GND" at 1661.45,2759.95 h39.37
  text "TX" at 1665.39,2653.65 h39.37
  text "RX" at 1669.33,2555.23 h39.37
  text "5V" at 1665.39,2456.8 h39.37
  text "GND" at 1645.71,2279.64 h15.75
  text "SDA" at 1645.71,2252.08 h15.75
  text "SCL" at 1649.65,2055.23 h15.75
  text "5V" at 1649.65,2019.8 h15.75
  text "+" at 3367.37,1883.2 h59.05 r135
  text "-" at 3076.81,1862.32 h59.05 r90
Bottom Overlay:
  text "POLAND" at 3419.33,4177.28 h59.05 r90
  text "DESIGNED" at 3322.87,4173.34 h39.37 r90
  text "IN" at 3303.19,3878.06 h39.37

## Text inside footprints (layer, text, board x,y; h text height)
BUZZ: Top Overlay "FST" at 2059.1,2941.69 h80 r180
SDCARD: Top Overlay "OPEN" at 2028.39,4291.06 h39.37 r180; Top Overlay "LOCK" at 2021.35,3886.76 h39.37 r180